# Altium PCB 222.PcbDoc
Units mil, origin at the board's own origin, x right, y up, seen from the top; angles counter-clockwise.
Board outline 1377.95 x 1102.36 mil, 2 copper layers (Top Layer, Bottom Layer); 11 components, 14 nets, 73 pads, 26 vias.
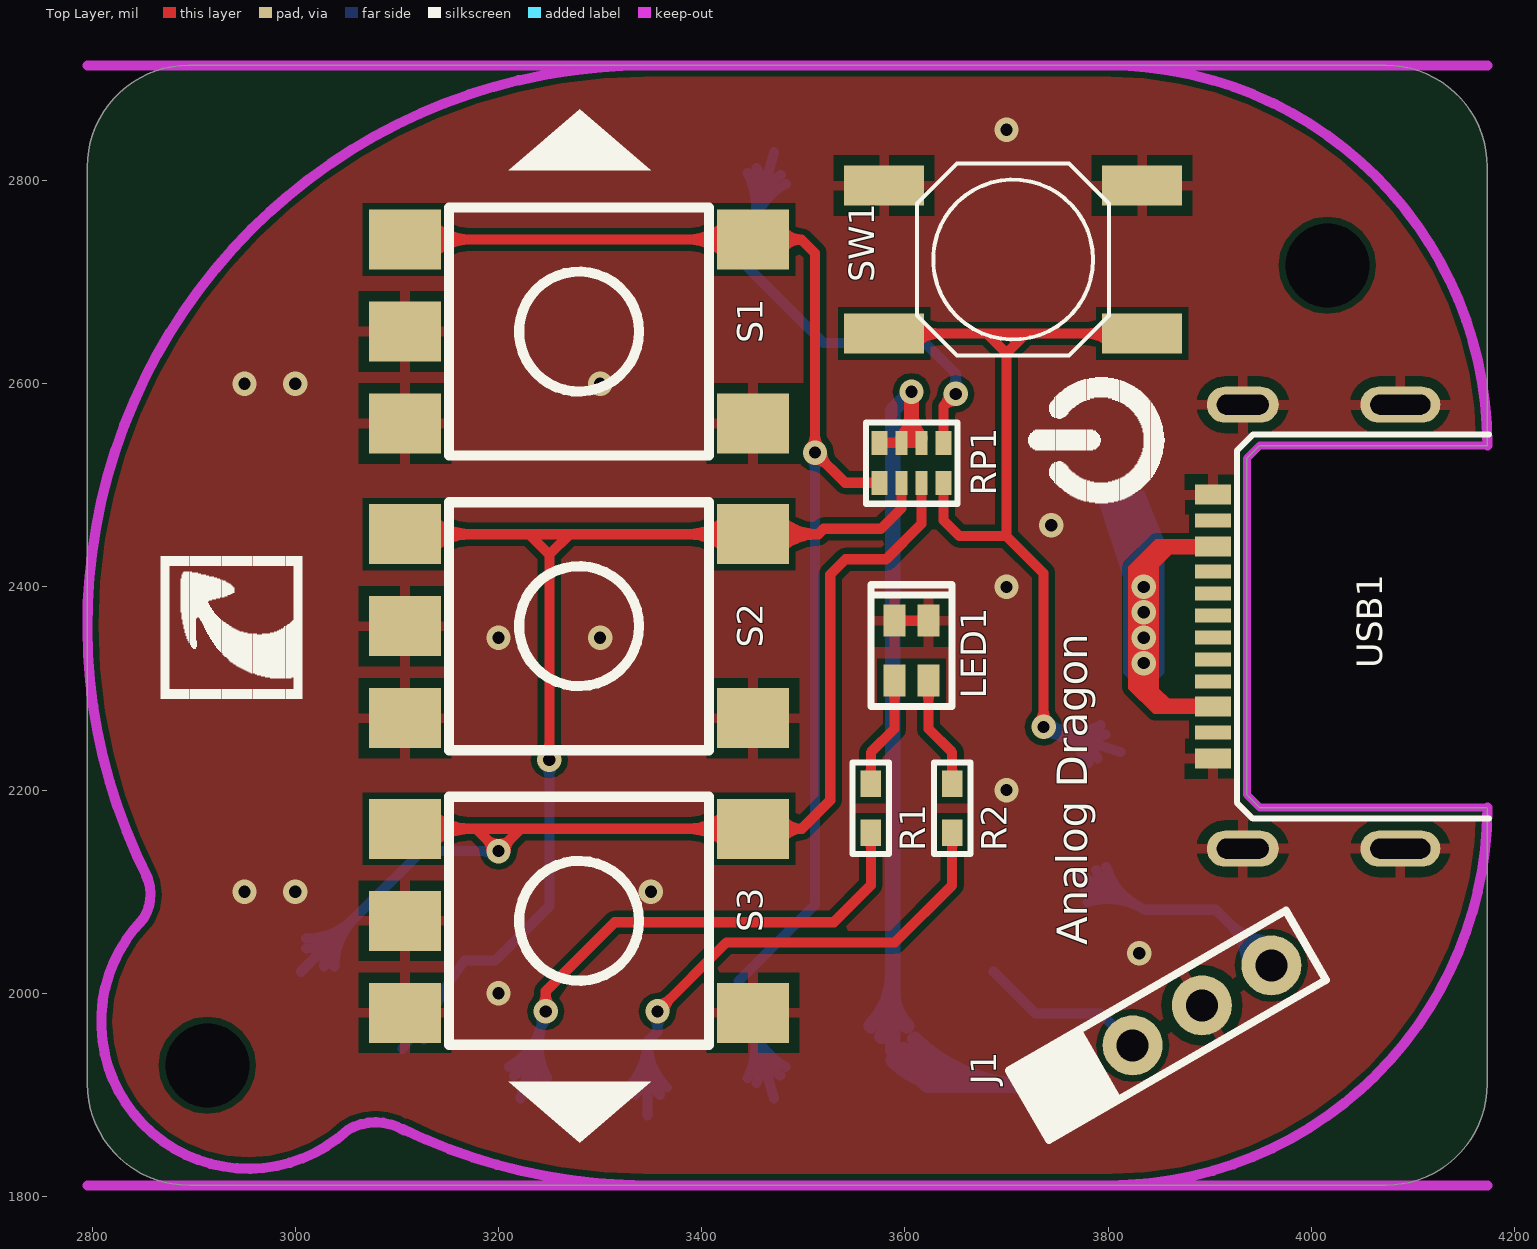
[diagram p0: Top Layer view]
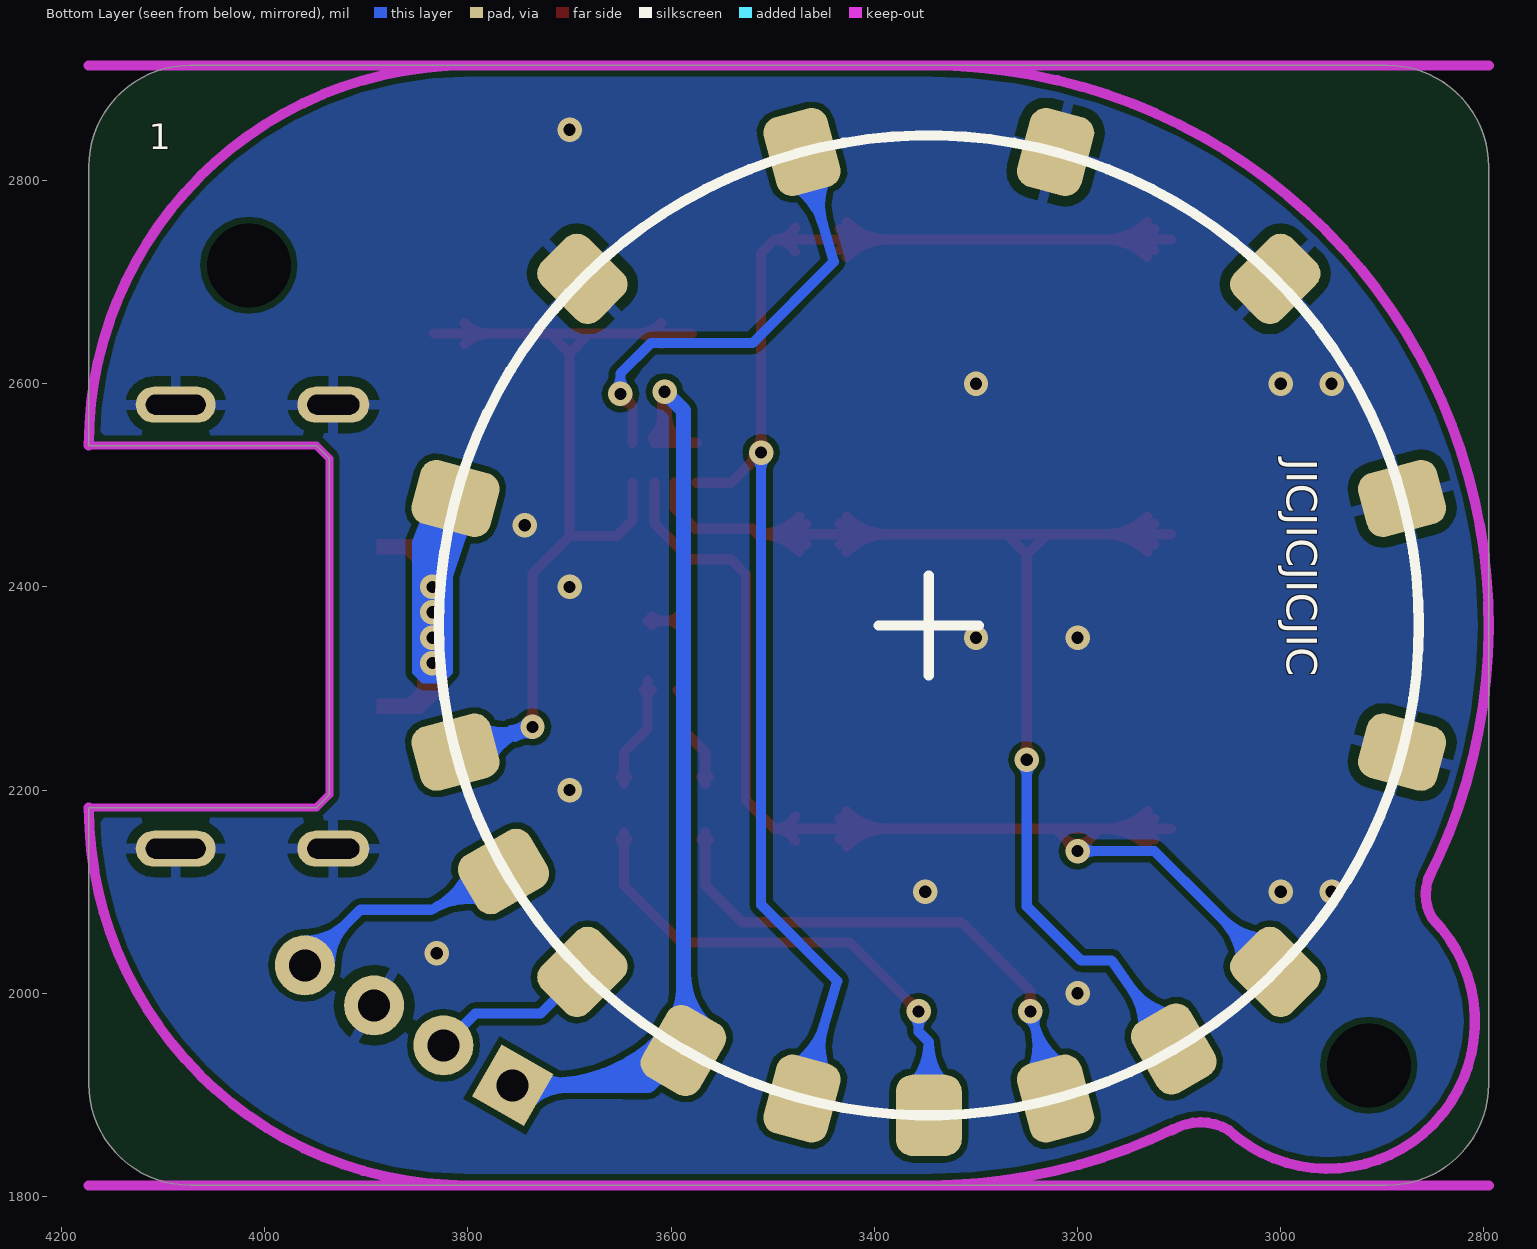
[diagram p1: Bottom Layer view, seen from below]
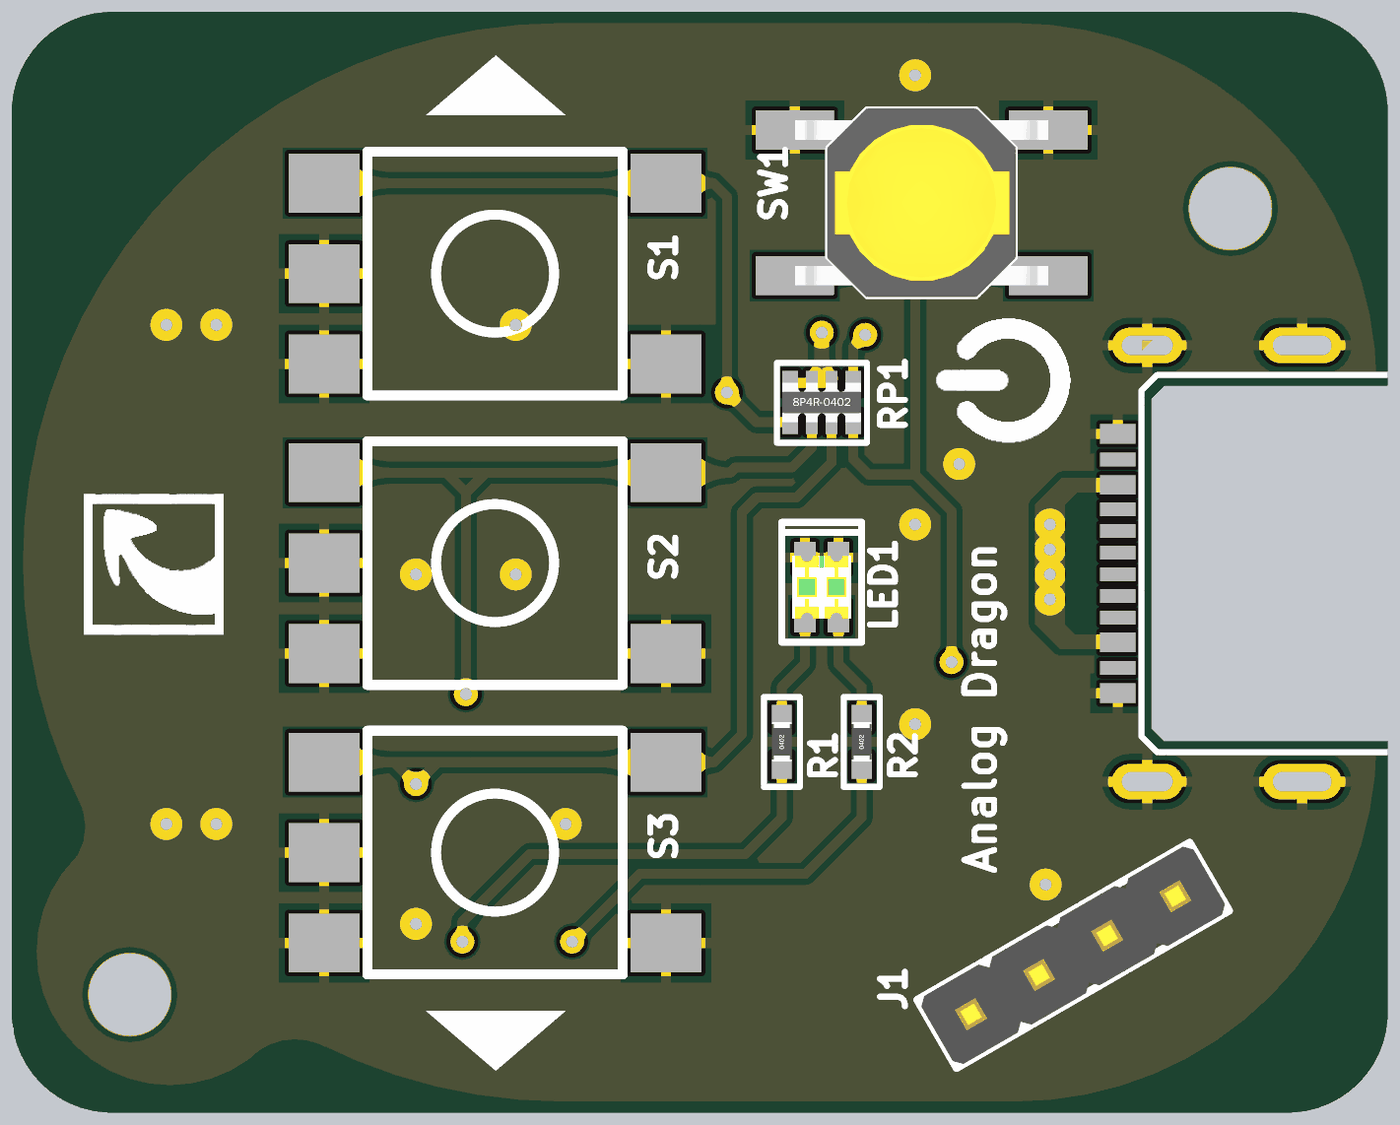
[diagram p2: 3D render of the assembled board from above, using the file's embedded part models]

## Layer stack, top to bottom
Top Layer: signal copper 1.4
Dielectric: dielectric 12.6, FR-4, Dk 4.8
Bottom Layer: signal copper 1.4

## Board outline
3326.77,2913.39 2895.28,2913.39 ccw(c2895.28,2813.39) 2795.28,2813.39 2795.28,1968.5 2795.28,1911.02 ccw(c2895.28,1911.02) 2895.28,1811.02 2992.13,1811.02 4073.23,1811.02 ccw(c4073.23,1911.02) 4173.23,1911.02 4173.23,2007.87 4173.23,2182.77 3949.26,2182.77 3936.46,2195.57 3936.46,2526.28 3949.26,2539.07 4173.23,2539.07 4173.23,2813.39 ccw(c4073.23,2813.39) 4073.23,2913.39 3720.47,2913.39

## Design rules (kind name [scope] priority, off if disabled: settings)
Clearance [All] p1: gap=6
ComponentClearance [All] p1 off: gap=10 collisioncheckmode=3 verticalgap=10 showdistances=FALSE
Height [All] p1 off: minheight=0 maxheight=1000 prefheight=500
PolygonConnect PolygonConnect_1 [IsVia] p1: connectstyle=Direct reliefconductorwidth=10 reliefentries=4 polygonreliefangle="90 Angle" airgapwidth=10
PolygonConnect [All] p2: connectstyle=Relief reliefconductorwidth=10 reliefentries=4 polygonreliefangle="90 Angle" airgapwidth=10
RoutingVias [All] p1: holewidth=28 width=50 viastyle="Through Hole" minholewidth=28 minwidth=50 maxholewidth=28 maxwidth=50
SolderMaskExpansion [All] p1: expansion=4
Width [All] p1: maxlimit=100 minlimit=1 preferedwidth=10
26 further rules are at their usual default settings.

## Components (designator, comment, footprint, x,y, rotation, side; value= is the part's Value field where it differs from the comment)
1 "LED_Board" LED_PAD 3346.46,2362.2 r180 bottom
J1 "HDR-1X4" HDR2.0-LI-4P 3858.27,1968.5 r30 top
LED1 "0603" "LED 0603-RG" 3606.46,2337.2 r90 top
R1 "1K" "R 0402_M" 3566.46,2182.2 r90 top
R2 "1K" "R 0402_M" 3646.46,2182.2 r90 top
RP1 "103" RCA-8P4R-0402 3606.46,2522.2 r0 top
S1 "SW-6*6 5P" SW6*6 3450,2560 r180 top
S2 "SW-6*6 5P" SW6*6 3450,2270 r180 top
S3 "SW-6*6 5P" SW6*6 3450,1980 r180 top
SW1 "4x4x0.8" TS-027A 3706.46,2722.2 r0 top
USB1 "TYPE-C" TYPE-C 3903,2491 r270 top

## Footprints (in the part's own frame and the unit in brackets; to place one, negate y for a bottom-side part, rotate by r counter-clockwise, add the part's x,y. Pads: shape width x height; smd on the part's side, far side on the other; paste and mask are expansions set on the pad)
HDR2.0-LI-4P [mm] "直插，脚距：2.0mm"
  rect 1.5x1.5 hole 0.8: 1(-3,0)
  round 1.5 hole 0.8: 2(-1,0) 3(1,0) 4(3,0)
  silkscreen extent -4,-1 4,1, body extent -4,-1 4,1, height 6.5
"LED 0603-RG" [mm] "1.5x1.6 mm"
  rect 0.8x0.55 smd: 1(-0.75,0.425) 2(-0.75,-0.425) 3(0.75,-0.425) 4(0.75,0.425)
  silkscreen extent -1.4,-1.02 1.65,1.02, body extent -0.8,-0.75 0.8,0.75, height 0.58
LED_PAD [mil]
  rrect50% 80x65 smd rot 15: 1(-465.85,-124.82) 11(465.85,124.82)
  rrect50% 80x65 smd rot 30: 2(-418.69,-242.28)
  rrect50% 80x65 smd rot 45: 3(-341.03,-341.03) 12(341.03,341.03)
  rrect50% 80x65 smd rot 60: 4(-241.5,-418.38)
  rrect50% 80x65 smd rot 75: 5(-124.82,-465.85) 13(124.82,465.85)
  rrect50% 65x80 smd: 6(0,-482.28)
  rrect50% 80x65 smd rot 105: 7(124.82,-465.85) 14(-124.82,465.85)
  rrect50% 80x65 smd rot 120: 8(241.1,-416.88)
  rrect50% 80x65 smd rot 135: 9(341.03,-341.03) 15(-341.03,341.03)
  rrect50% 80x65 smd rot 165: 10(465.85,-124.82) 16(-465.85,124.82)
  silkscreen extent -482,-482 482,482
"R 0402_M" [mil] "1/16W贴片电阻"
  rect 26x20 smd: 1(-24,0) 2(24,0)
  silkscreen extent -45,-18 45,18, body extent -20,-10 20,10, height 12
RCA-8P4R-0402 [mm] "2mm*1mm*0.45mm(长*宽*厚)"
  rect 0.4x0.6 smd: 1(-0.8,-0.5) 4(0.8,-0.5) 5(0.8,0.5) 8(-0.8,0.5)
  rect 0.3x0.6 smd: 2(-0.25,-0.5) 3(0.25,-0.5) 6(0.25,0.5) 7(-0.25,0.5)
  silkscreen extent -1.14,-1.02 1.15,1.01, body extent -1,-0.5 1,0.5, height 0.45
SW6*6 [mm]
  rect 1.8x1.5 smd: 1(-0.013,-0.021) 2(-0.013,-4.621) 3(8.687,-4.621) 4(8.687,-0.021) 5(8.687,-2.321)
  silkscreen extent 1.09,-5.42 7.59,0.78
TS-027A [mm] "4x4x0.8"
  rect 2x1 smd: 1(-3.225,1.85) 2(-3.225,-1.85) 3(3.225,-1.85) 4(3.225,1.85)
  silkscreen extent -2.4,-2.4 2.4,2.4, body extent -3.22,-2.4 3.23,2.4, height 0.8
TYPE-C [mm]
  rect 0.35x0.9 smd: CC1(4.129,0) CC2(0.654,0) D+1(3.579,0) D+2(1.929,0) D-1(4.679,0) D-2(3.029,0) SBU1(2.479,0) SBU2(5.954,0)
  oval 0.9x2 hole 0.5 slot 1.5 at 90 deg: GND(-2.246,4.69) GND(8.854,4.69)
  oval 0.9x1.8 hole 0.5 slot 1.3 at 90 deg: GND(-2.246,0.75) GND(8.854,0.75)
  rect 0.5x0.9 smd: GND(0.004,0) GND(6.604,0) VBUS(1.304,0) VBUS(5.304,0)
  Keep-Out Layer lines w0.2: 7.829,6.85 7.829,1.175 7.504,0.85 5.904,0.85 -0.896,0.85 -1.221,1.175 -1.221,6.85
  silkscreen extent -1.5,0.6 8.1,6.9

## Part data
J1: library part "Header 4", "4P接插件"
LED1: library part LED-SMD-RG, "贴片双色LED"
R1 R2: library part R, "贴片电阻"
RP1: library part R-8P4R, "贴片网络排阻"
S1 S2 S3: "微动开关"
SW1: library part TS-027A, "薄膜轻触开关"
USB1: library part USB-C

## Free pads (board coordinates)
  round 0 hole 82.68: 0(2913.39,1929.13) 0(4015.75,2716.54)

## Via types
v1: diameter 24, hole 12, Top Layer to Bottom Layer, 26 vias

## Nets (pads, with @x,y where several pads share a name; then routed paths per layer and width w, separated by ;. In a path a pad name is that pad's centre, name@x,y a point inside that pad or via, vN(x,y) a via of type N, cw(c..) or ccw(c..) an arc to the next point about the centre after c; other vN are vias at no path point)
CLK: 1.2 J1.4 | length 546.2
  Bottom Layer w10: 1.2 3836.46,2082.2 3905.91,2082.2 J1.4 ; 1.2@3776.79,2099.45 cw(c3789.51,2058.17) 3809.71,2096.35 ; 1.2@3779.74,2089.89 cw(c3799.57,2025.54) 3831.05,2085.06 ; 1.2@3788.37,2121.33 ccw(c3827.84,2133.49) 3808.53,2096.98 ; 1.2@3797.92,2124.27 ccw(c3860.47,2143.54) 3829.87,2085.69 ; J1.4@3936.03,2027.56 ccw(c3876.81,2027.56) 3918.68,2069.43 ccw(c3960.55,2111.3) J1.4@3960.55,2052.09 ; J1.4@3946.03,2027.56 ccw(c3910.95,2027.56) 3935.75,2052.36 ccw(c3960.55,2077.16) J1.4@3960.55,2042.09
DIO: 1.3 J1.2 | length 166.7
  Bottom Layer w10: 1.3 3728.66,1980 3792.99,1980 J1.2
GND: 1.10 1.11 1.12 1.13 1.15 J1.3 LED1.3 LED1.4 S1.1 S1.4 S1.5 S2.1 S2.4 S2.5 S3.1 S3.4 S3.5 SW1.1 SW1.4 USB1.GND | length 77.7
  Top Layer w10: LED1.4 LED1.3 ; LED1.4@3593.84,2362.62 cw(c3603.78,2352.67) 3603.78,2366.74 cw(c3603.78,2380.81) LED1.4@3593.84,2370.86 ; LED1.3@3619.06,2362.62 ccw(c3609.12,2352.67) 3609.12,2366.74 ccw(c3609.12,2380.81) LED1.3@3619.06,2370.86
  other v1: 3200,2000 3830.71,2039.37 2950,2100 3000,2100 3350,2100 3700,2200 3200,2350 3300,2350 3700,2400 3744.09,2460.63 2950,2600 3000,2600 3300,2600 3700,2850
KEY1: 1.5 RP1.1 S1.2 S1.3 | length 1948.9
  Top Layer w10: S1.3 S1.2 3498.07,2741.93 ; S1.3@3124.17,2731.66 cw(c3148.97,2706.86) 3148.97,2741.93 cw(c3148.97,2777) S1.3@3124.17,2752.2 ; S1.3@3131.24,2724.59 cw(c3173.11,2682.71) 3173.11,2741.93 cw(c3173.11,2801.14) S1.3@3131.24,2759.27 ; S1.2@3427.26,2724.59 ccw(c3385.39,2682.71) 3385.39,2741.93 ccw(c3385.39,2801.14) S1.2@3427.26,2759.27 ; S1.2@3434.33,2731.66 ccw(c3409.53,2706.86) 3409.53,2741.93 ccw(c3409.53,2777) S1.2@3434.33,2752.2 ; S1.2@3477.87,2730.03 cw(c3498.07,2718.83) 3498.07,2741.93 ; S1.2@3477.87,2753.83 ccw(c3498.07,2765.03) 3498.07,2741.93 ; v1@3506.51,2537.15 ccw(c3494.56,2549.1) 3511.46,2549.1 ccw(c3528.36,2549.1) v1@3516.41,2537.15 ; v1@3511.46,2525.2 cw(c3511.46,2508.31) 3523.41,2520.25 cw(c3535.36,2532.2) v1@3518.46,2532.2 ; RP1.1 3541.14,2502.52 v1(3511.46,2532.2) 3511.46,2728.54 3498.07,2741.93
  Bottom Layer w10: 1.5@3445.12,1916.62 ccw(c3387.33,1947.7) 3450.17,1966.59 ; 3449.85,1967.64 ccw(c3514.17,1986.97) 1.5@3482.36,1927.82 ; 1.5@3453.93,1911.89 ccw(c3417.4,1931.53) 3457.12,1943.47 ; 3456.8,1944.52 ccw(c3498,1956.9) 1.5@3477.63,1919.01 ; 1.5 3436.46,2012.2 3511.46,2087.2 v1(3511.46,2532.2) ; v1@3506.51,2527.25 cw(c3494.56,2515.31) 3511.46,2515.31 cw(c3528.36,2515.31) v1@3516.41,2527.25
KEY2: 1.8 RP1.2 S2.2 S2.3 | length 1803.6
  Top Layer w10: S2.3 3230,2451.93 ; S2.3@3124.17,2441.66 cw(c3148.97,2416.86) 3148.97,2451.93 cw(c3148.97,2487) S2.3@3124.17,2462.2 ; S2.3@3131.24,2434.59 cw(c3173.11,2392.71) 3173.11,2451.93 cw(c3173.11,2511.14) S2.3@3131.24,2469.27 ; v1@3245.05,2234.95 ccw(c3233.1,2246.9) 3250,2246.9 ccw(c3266.9,2246.9) v1@3254.95,2234.95 ; v1(3250,2230) 3250,2431.93 ; 3270,2451.93 3250,2431.93 ; S2.2@3427.26,2434.59 ccw(c3385.39,2392.71) 3385.39,2451.93 ccw(c3385.39,2511.14) S2.2@3427.26,2469.27 ; S2.2@3434.33,2441.66 ccw(c3409.53,2416.86) 3409.53,2451.93 ccw(c3409.53,2487) S2.2@3434.33,2462.2 ; S2.2@3466.8,2441.77 cw(c3490.95,2418.15) 3490.95,2451.93 cw(c3490.95,2485.71) S2.2@3466.8,2462.09 ; S2.2@3473.95,2434.78 cw(c3514.72,2394.89) 3514.72,2451.93 ; S2.2@3473.95,2469.08 ccw(c3514.72,2508.96) 3514.72,2451.93 ; RP1.2 3596.61,2477.36 3576.46,2457.2 3520,2457.2 3514.72,2451.93 ; 3230,2451.93 S2.2 3514.72,2451.93 ; 3230,2451.93 3250,2431.93
  Bottom Layer w10: 1.8@3104.39,1978.91 ccw(c3092.6,2046.57) 3148.78,2007.06 ; 1.8 3166.46,2032.2 3196.46,2032.2 3250,2085.75 v1(3250,2230) ; 1.8@3106.1,1969.06 ccw(c3098.46,2012.93) 3134.89,1987.32 ; 1.8@3126.35,1954.82 cw(c3165.72,1961.68) 3133.03,1984.67 ; 1.8@3136.2,1956.54 cw(c3199.36,1967.54) 3146.92,2004.42 ; v1@3245.05,2225.05 cw(c3233.1,2213.1) 3250,2213.1 cw(c3266.9,2213.1) v1@3254.95,2225.05
KEY3: 1.9 RP1.3 S3.2 S3.3 | length 1702.1
  Top Layer w10: S3.3 3220,2161.93 ; S3.3@3124.17,2151.66 cw(c3148.97,2126.86) 3148.97,2161.93 cw(c3148.97,2197) S3.3@3124.17,2172.2 ; S3.3@3131.24,2144.59 cw(c3173.11,2102.71) 3173.11,2161.93 cw(c3173.11,2221.14) S3.3@3131.24,2179.27 ; 3180,2160 v1(3200,2140) 3220,2160 3220,2161.93 ; v1@3193,2140 ccw(c3176.1,2140) 3188.05,2151.95 ccw(c3200,2163.9) 3200,2147 ccw(c3200,2163.9) 3211.95,2151.95 ccw(c3223.9,2140) v1@3207,2140 ; S3.2@3427.26,2144.59 ccw(c3385.39,2102.71) 3385.39,2161.93 ccw(c3385.39,2221.14) S3.2@3427.26,2179.27 ; S3.2@3434.33,2151.66 ccw(c3409.53,2126.86) 3409.53,2161.93 ccw(c3409.53,2197) S3.2@3434.33,2172.2 ; S3.2@3477.79,2149.89 cw(c3498.38,2138.29) 3498.38,2161.93 ; S3.2@3477.79,2173.97 ccw(c3498.38,2185.57) 3498.38,2161.93 ; RP1.3 3616.3,2462.05 3581.46,2427.2 3541.46,2427.2 3526.46,2412.2 3526.46,2190 3498.39,2161.93 ; 3220,2161.93 S3.2 3498.39,2161.93
  Bottom Layer w10: 1.9 3066.46,2082.2 3124.25,2140 v1(3200,2140) ; 1.9@3010.73,2043.98 ccw(c3010.73,2086.23) 3040.61,2056.36 ccw(c3070.48,2026.48) 1.9@3028.23,2026.48 ; 1.9@3010.73,2053.98 ccw(c3010.73,2120.37) 3057.68,2073.43 ccw(c3104.62,2026.48) 1.9@3038.23,2026.48 ; v1@3195.05,2135.05 ccw(c3183.1,2123.1) 3183.1,2140 ccw(c3183.1,2156.9) v1@3195.05,2144.95
LED1: 1.6 R2.1 | length 736.1
  Top Layer w10: v1(3356.46,1982.2) 3424.25,2050 3590,2050 3646.46,2106.46 R2.1 ; v1@3356.46,1989.2 ccw(c3356.46,2006.1) 3368.41,1994.15 ccw(c3380.36,1982.2) v1@3363.46,1982.2 ; R2.1@3642.92,2151.67 cw(c3634.39,2143.13) 3646.46,2143.13 cw(c3658.53,2143.13) R2.1@3649.99,2151.67
  Bottom Layer w10: 1.6@3327.35,1907.2 ccw(c3283.91,1952.2) 3346.46,1952.2 ; 1.6@3334.3,1900.01 ccw(c3306.65,1928.64) 3346.46,1928.64 ccw(c3386.26,1928.64) 1.6@3358.61,1900.01 ; 1.6 3346.46,1952.2 ; v1@3351.51,1977.25 cw(c3339.56,1965.31) 3356.46,1965.31 cw(c3373.36,1965.31) v1@3361.41,1977.25 ; v1(3356.46,1982.2) 3356.46,1962.2 3346.46,1952.2 ; 1.6@3365.56,1907.2 cw(c3409,1952.2) 3346.46,1952.2
LED2: 1.7 R1.1 | length 767
  Top Layer w10: v1@3241.51,1987.15 ccw(c3229.56,1999.1) 3246.46,1999.1 ccw(c3263.36,1999.1) v1@3251.41,1987.15 ; v1(3246.46,1982.2) 3246.46,2002.2 3314.25,2070 3530,2070 3566.46,2106.46 R1.1 ; R1.1@3562.92,2151.67 cw(c3554.39,2143.13) 3566.46,2143.13 cw(c3578.53,2143.13) R1.1@3569.99,2151.67
  Bottom Layer w10: 1.7@3210.29,1927.68 ccw(c3177.99,1986.26) 3242.26,1967.68 ; 1.7@3215.12,1918.92 ccw(c3194.48,1956.36) 3235.55,1944.49 ; 1.7 v1(3246.46,1982.2) ; 3235.35,1943.8 ccw(c3275.45,1932.21) 1.7@3238.9,1912.05 ; v1@3240.33,1978.82 cw(c3225.53,1970.66) 3241.76,1965.97 cw(c3258,1961.28) v1@3249.84,1976.07 ; 3242.06,1966.99 ccw(c3305.35,1948.69) 1.7@3247.66,1916.88
NetLED1_1: LED1.1 R1.2 | length 152.2
  Top Layer w10: R1.2@3562.92,2212.74 ccw(c3554.39,2221.28) 3566.46,2221.28 ccw(c3578.53,2221.28) R1.2@3569.99,2212.74 ; R1.2 3566.46,2237.2 3589.72,2260.47 LED1.1 ; LED1.1@3585.6,2298.64 cw(c3575.65,2288.7) 3589.72,2288.7 cw(c3603.78,2288.7) LED1.1@3593.84,2298.64
NetLED1_2: LED1.2 R2.2 | length 152.2
  Top Layer w10: LED1.2@3619.06,2298.64 cw(c3609.12,2288.7) 3623.18,2288.7 cw(c3637.25,2288.7) LED1.2@3627.3,2298.64 ; LED1.2 3623.18,2260.48 3646.46,2237.2 R2.2 ; R2.2@3642.92,2212.74 ccw(c3634.39,2221.28) 3646.46,2221.28 ccw(c3658.53,2221.28) R2.2@3649.99,2212.74
PWK: 1.1 RP1.4 SW1.2 SW1.3 | length 1265
  Top Layer w10: SW1.2 SW1.3 ; SW1.2@3609.56,2638.99 cw(c3634.63,2613.92) 3634.63,2649.37 cw(c3634.63,2684.82) SW1.2@3609.56,2659.75 ; RP1.4 3637.95,2465.71 3653.66,2450 3700,2450 ; 3680.63,2649.37 3700,2630 ; 3719.37,2649.37 3700,2630 ; v1@3731.51,2267.15 ccw(c3719.56,2279.1) 3736.46,2279.1 ccw(c3753.36,2279.1) v1@3741.41,2267.15 ; v1(3736.46,2262.2) 3736.46,2413.54 3700,2450 ; SW1.3@3803.36,2638.99 ccw(c3778.29,2613.92) 3778.29,2649.37 ccw(c3778.29,2684.82) SW1.3@3803.36,2659.75 ; 3700,2450 3700,2630
  Bottom Layer w10: v1(3736.46,2262.2) 1.1 ; v1@3737.9,2255.35 cw(c3742.27,2234.54) 3753.9,2252.35 ; v1@3739.62,2255.96 cw(c3747.26,2240.89) 3752.52,2256.95 cw(c3757.77,2273.01) v1@3742.7,2265.37 ; v1@3741.13,2256.99 cw(c3748.33,2248.96) 3748.92,2259.73 ; v1@3741.15,2260.67 cw(c3720.07,2196.24) 1.1@3780.53,2226.89 ; v1@3741.67,2266.88 ccw(c3758.8,2282.24) 3757.55,2259.26 ; v1@3743.03,2260.05 ccw(c3763.25,2321.83) 1.1@3792.63,2263.85 ; v1@3743.31,2263.65 ccw(c3755.57,2266.22) 3748.72,2255.73 ; 3764.1,2253.16 cw(c3750.52,2211.68) 1.1@3789.45,2231.41 ; 3765.97,2252.54 ccw(c3778.68,2291.37) 1.1@3797.15,2254.93
VBAT: 1.14 RP1.5 | length 664.9
  Top Layer w10: RP1.5 3637.95,2577.95 v1(3650,2590) ; v1@3643,2590 cw(c3626.1,2590) 3638.05,2578.05 cw(c3650,2566.1) v1@3650,2583
  Bottom Layer w10: 1.14@3445.25,2807.54 cw(c3387.55,2775.75) 3450.83,2757.43 ; 3450.63,2756.73 cw(c3514.9,2738.13) 1.14@3482.61,2796.72 ; 1.14@3454.01,2812.37 cw(c3417.46,2792.22) 3457.55,2780.62 ; 3457.35,2779.92 cw(c3498.42,2768.03) 1.14@3477.79,2805.48 ; 1.14 3440,2720 3520,2640 3620,2640 3650,2610 v1(3650,2590) ; v1@3645.05,2594.95 ccw(c3633.1,2606.9) 3650,2606.9 ccw(c3666.9,2606.9) v1@3654.95,2594.95
VBUS: 1.16 USB1.VBUS
  other v1: 3835,2325 3835,2350 3835,2375 3835,2400
VCC3: 1.4 J1.1 RP1.6 RP1.7 RP1.8 | length 1454.9
  Top Layer w10: RP1.8 RP1.7 RP1.6
  Top Layer w15: RP1.7@3597.74,2546.67 ccw(c3576.7,2567.71) 3606.46,2567.71 ccw(c3636.21,2567.71) RP1.6@3615.17,2546.67 ; 3606.46,2552.2 v1(3606.46,2592.2)
  Bottom Layer w15: 1.4@3566.53,1968 ccw(c3514.8,2019.73) 3587.96,2019.73 ; 1.4@3577.14,1957.4 ccw(c3551.01,1983.52) 1.4@3587.96,1983.52 ; 3587.96,2001.63 ccw(c3635.51,2001.63) 1.4@3601.88,1968 ; 1.4@3588.17,1933.8 ccw(c3646.96,1992.58) 3646.96,1909.45 ; 1.4@3598.78,1944.4 ccw(c3683.17,2028.8) 3683.17,1909.45 ; v1(3606.46,2592.2) 3587.96,2573.7 1.4 3622.34,1909.45 J1.1 ; 1.4@3609.38,1955.01 ccw(c3719.38,2065.01) 3719.38,1909.45 ; J1.1@3740.41,1893.87 ccw(c3702.8,1856.27) 3702.8,1909.45 ccw(c3702.8,1962.63) J1.1@3740.41,1925.02
pads on no net: USB1.CC1 USB1.CC2 USB1.D+1 USB1.D+2 USB1.D-1 USB1.D-2 USB1.SBU1 USB1.SBU2

## Polygon pours and split planes (outlines as drawn)
GND on Bottom Layer "Top Overlay-No Net" (solid, remove dead copper, pour order 4): 2795.28,2913.39 2795.28,1811.02 4173.23,1811.02 4173.23,2913.39
GND on Top Layer "Top Overlay-No Net" (solid, remove dead copper, pour order 6): 2795.28,2913.39 2795.28,1811.02 4173.23,1811.02 4173.23,2913.39

## Keep-outs
Keep-Out Layer:
  lines w10: 2795.28,1811.02 4173.23,1811.02 ; 2795.28,2913.39 4173.23,2913.39 ; 2850.61,2073.69 ccw(c2953.67,1972.09) 3051.28,1865.23 ; 2850.68,2073.64 ccw(c2812.69,2097.14) 2852.97,2116.47 ; 2854.84,2112.98 cw(c3346.46,2362.2) 3346.46,2913.39 ; 3051.24,1865.29 cw(c3079.01,1819.64) 3106.99,1865.17 ; 3105.26,1866.6 ccw(c3346.46,2362.2) 3346.46,1811.02 ; 3800,1811.02 ccw(c3800.74,2183.51) 4173.23,2182.77 ; 3800,2913.39 cw(c3799.46,2539.61) 4173.23,2539.07

## Other copper
Top Layer:
  region net VBUS: 3890,2447 3890,2432 3862,2432 3850,2420 3850,2300 3860,2290 3890,2290 3890,2275 3845,2275 3820,2300 3820,2420 3847,2447
Bottom Layer:
  region net VBUS: 3825,2305 3845,2305 3855,2315 3855,2445 3835,2495 3807.03,2487.03 3790.53,2483.41 3815,2410 3815,2315

## Silkscreen, mask and mechanical layers (free items; w line width, h text height)
Top Overlay:
  drawing of 681 lines, arcs and shapes, not listed
  text "Analog Dragon" at 3779.53,2047.24 h30 r90
Bottom Overlay:
  text "JICJICJICJIC" at 2994,2526 h30 r90